# Altium PCB JacdacEc30RgbLedRing8 105.PcbDoc
Units mm, origin at the board's own origin, x right, y up, seen from the top; angles counter-clockwise.
Board outline 36.5 x 35 mm, 2 copper layers (Top Layer, Bottom Layer), stack 1.525 mm thick; 15 components, 3 nets, 58 pads, 1 vias.
Unrouted connection lines stored in the file: 9.
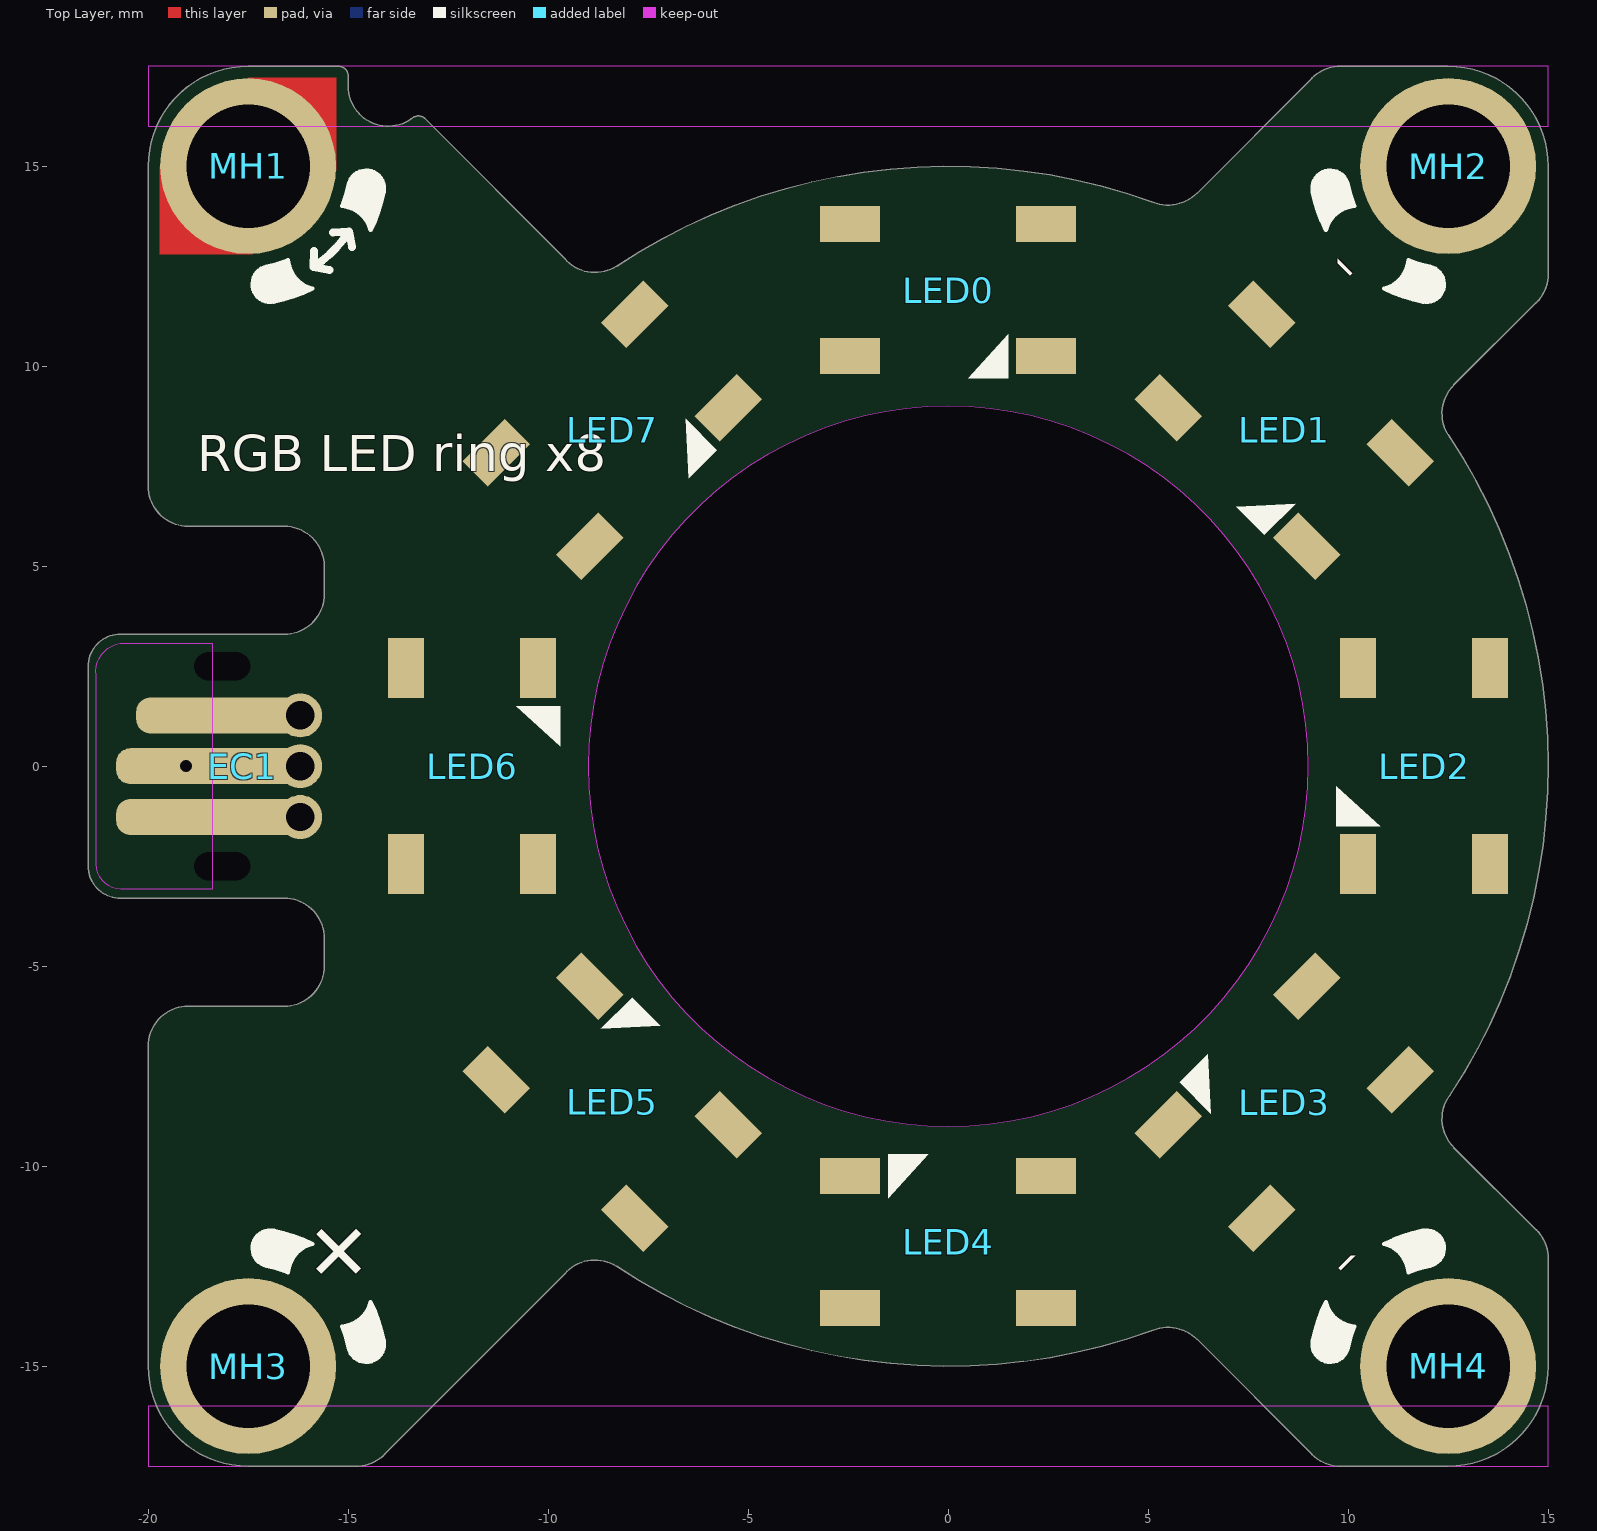
[diagram p0: Top Layer view]
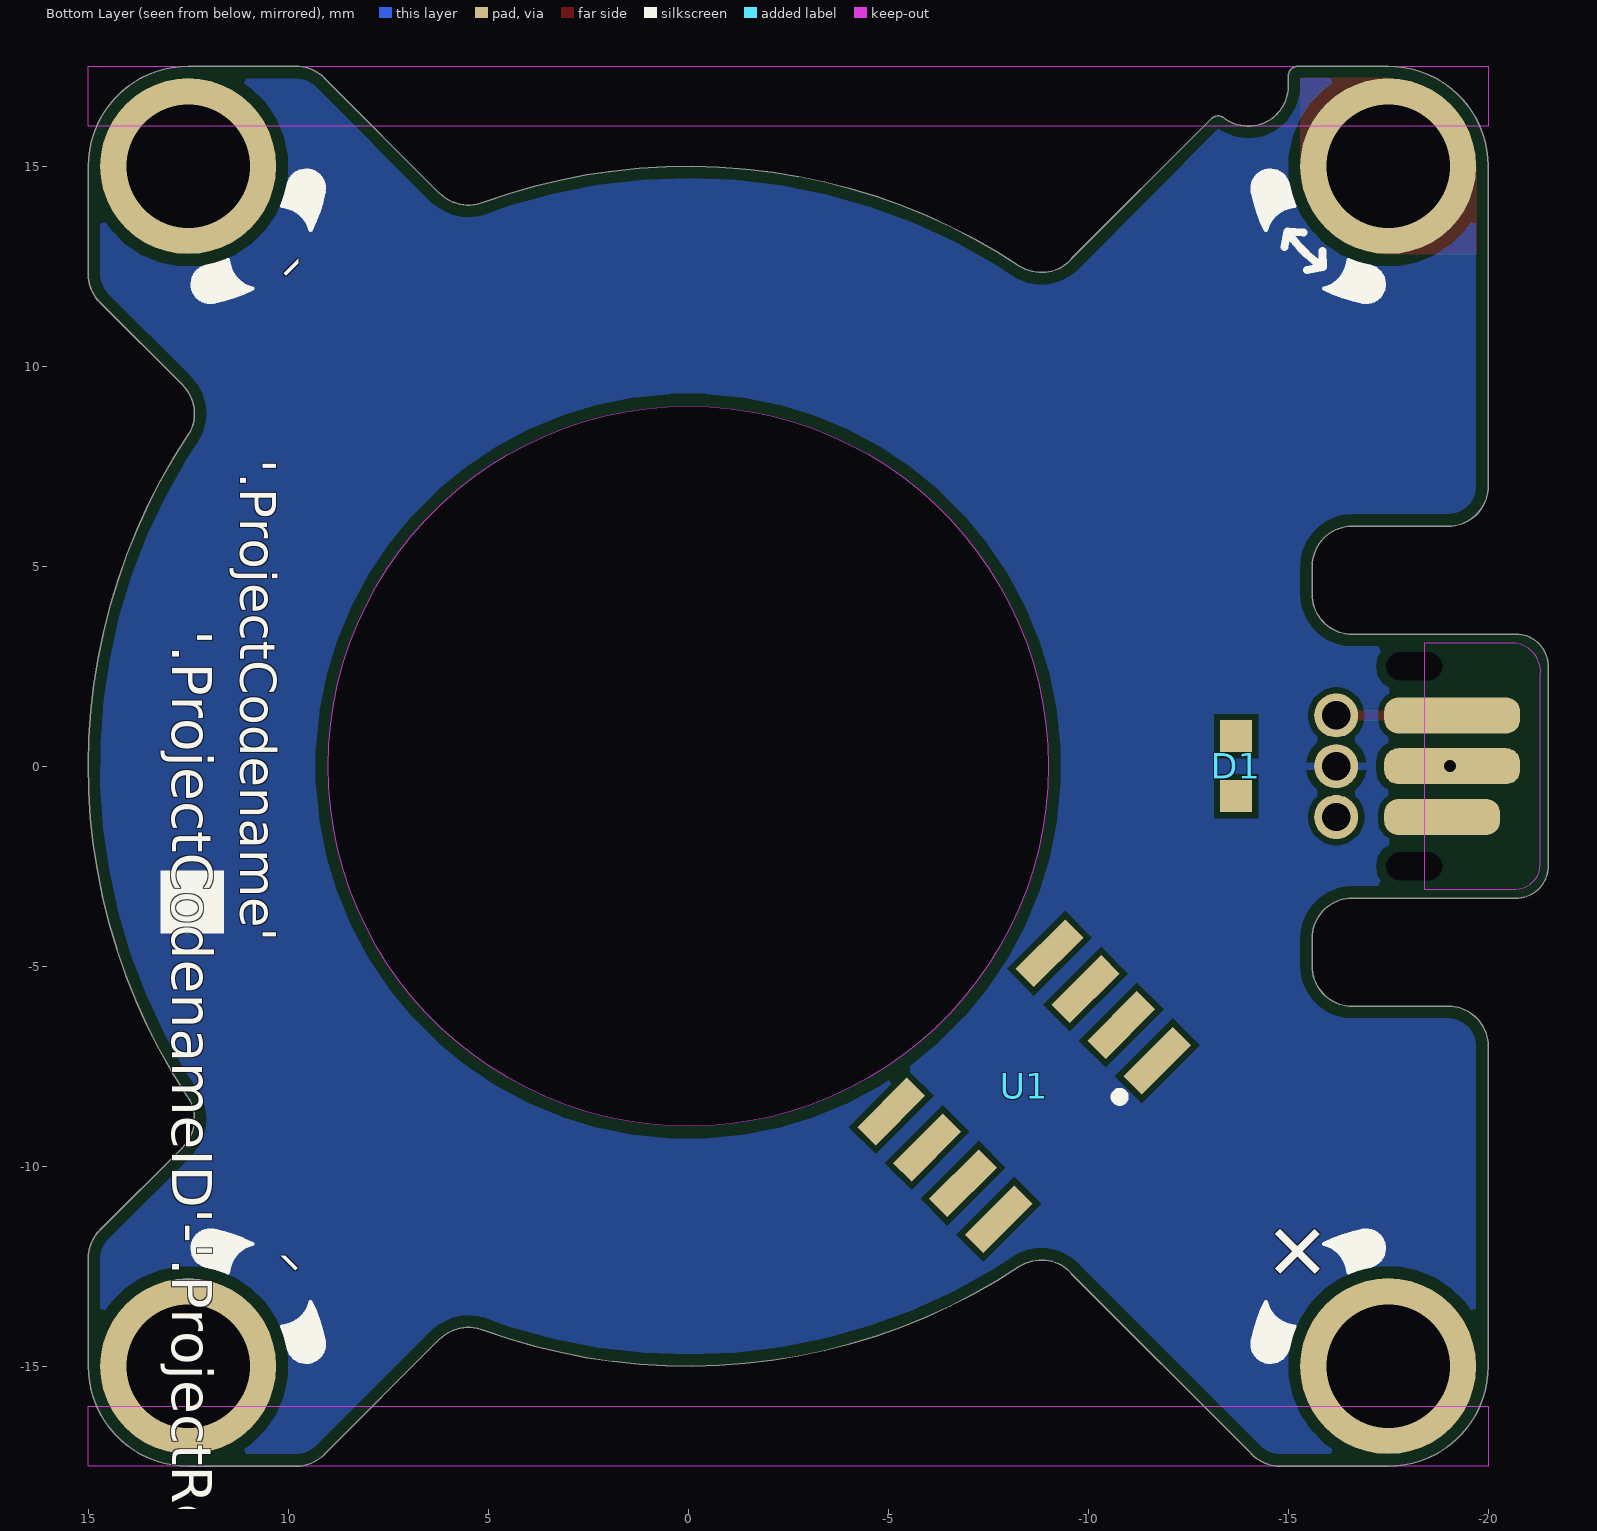
[diagram p1: Bottom Layer view, seen from below]
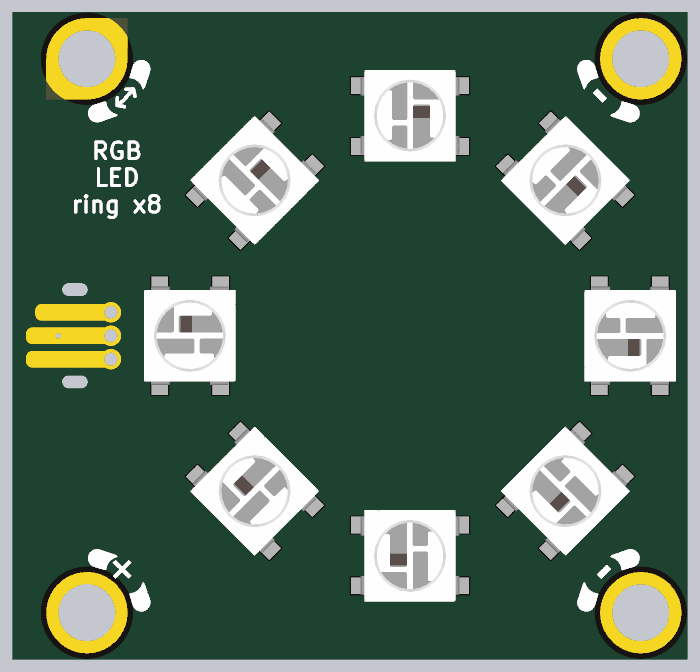
[diagram p2: 3D render of the assembled board from above, using the file's embedded part models]

## Layer stack, top to bottom
Top Solder: solder mask 0.0102, Solder Resist, Dk 3.5
Top Layer: signal copper 0.0356
Dielectric 1: core 1.454, FR-4, Dk 4.2
Bottom Layer: signal copper 0.0356
Bottom Solder: solder mask 0.0102, Solder Resist, Dk 3.5

## Board outline
-20,-7 cw(c-19,-7) -19,-6 -16.6,-6 ccw(c-16.6,-5) -15.6,-5 -15.6,-4.3 ccw(c-16.6,-4.3) -16.6,-3.3 -20.7,-3.3 cw(c-20.7,-2.5) -21.5,-2.5 -21.5,2.5 cw(c-20.7,2.5) -20.7,3.3 -16.6,3.3 -16.598,3.3 ccw(c-16.598,4.3) -15.598,4.3 -15.6,4.3 -15.6,5 ccw(c-16.6,5) -16.6,6 -19,6 cw(c-19,7) -20,7 -20,15 cw(c-17.5,15) -17.5,17.5 -15.25,17.5 cw(c-15.25,17.25) -15,17.25 -15,17 ccw(c-14,17) -13.357,16.234 -13.352,16.233 cw(c-13.247,16.007) -13.055,16.167 -9.59,12.698 -9.59,12.692 ccw(c-8.831,13.344) -8.288,12.505 -8.286,12.503 cw(c-0.001,-0.001) 5.119,14.099 5.121,14.105 ccw(c5.503,15.029) 6.218,14.329 6.22,14.318 9.1,17.208 9.093,17.206 cw(c9.8,16.498) 9.8,17.498 12.5,17.498 cw(c12.5,14.998) 15,14.998 15,12.298 cw(c14,12.298) 14.707,11.591 14.71,11.598 12.64,9.538 12.644,9.532 ccw(c13.344,8.817) 12.542,8.218 12.501,8.29 cw(c0,0) 12.546,-8.222 12.542,-8.22 ccw(c13.344,-8.818) 12.644,-9.533 12.64,-9.54 14.71,-11.6 14.707,-11.593 cw(c14,-12.3) 15,-12.3 15,-15 cw(c12.5,-15) 12.5,-17.5 9.8,-17.5 cw(c9.8,-16.5) 9.093,-17.207 9.1,-17.21 6.22,-14.32 6.218,-14.331 ccw(c5.503,-15.03) 5.121,-14.106 5.119,-14.1 cw(c-0.001,-0.001) -8.286,-12.505 -8.288,-12.506 ccw(c-8.831,-13.346) -9.59,-12.693 -9.59,-12.7 -14.1,-17.21 -14.093,-17.207 cw(c-14.8,-16.5) -14.8,-17.5 -17.5,-17.5 cw(c-17.5,-15) -20,-15
cut-out: -9,0 ccw(c0,0) 0,-9 ccw(c0,0) 9,0 ccw(c0,0) 0,9 ccw(c0,0)

## Design rules (kind name [scope] priority, off if disabled: settings)
AssemblyTestPointUsage [All] p1: valid=2
BoardOutlineClearance [not (HasFootprint('MOUSEBITE_CONNECTOR_3X2') or HasFootprint('MOUSEBITE_NOCONNECTOR_3'))] p1: gap=0.3 ignorepadtopadclearanceinfootprint=FALSE except(0: Arc-SplitContinuation Track-SplitContinuation SMDPad-SplitContinuation THPad-SplitContinuation Via-SplitContinuation Fill-SplitContinuation Poly-SplitContinuation Text-OutlineEdge Text-CavityEdge Text-CutoutEdge Text-SplitBarrior Text-SplitContinuation; 0.15: Region-OutlineEdge Region-CavityEdge Region-CutoutEdge Region-SplitBarrior Region-SplitContinuation)
Clearance [not (IsPad and HasFootprint('MOUSEBITE_CONNECTOR_3X2'))] p1: gap=0.15 ignorepadtopadclearanceinfootprint=FALSE except(0.254: Arc-Hole Track-Hole SMDPad-Hole THPad-Hole Via-Hole Fill-Hole Poly-Hole Region-Hole Text-Hole)
ComponentClearance [All] p1: gap=0.01 collisioncheckmode=3 verticalgap=0.2 showdistances=FALSE
DiffPairsRouting [All] p1: maxlimit=2 minlimit=0.15 mostfreqgap=0.15 toplayer_minwidth=0.15 toplayer_maxwidth=2 toplayer_prefwidth=0.15 bottomlayer_minwidth=0.15 bottomlayer_maxwidth=2 bottomlayer_prefwidth=0.15 substack1={CB9D278B-8BF5-444A-AAF4-837A2A9DF42D} toplayer_{cb9d278b-8bf5-444a-aaf4-837a2a9df42d}_minwidth=0.381 toplayer_{cb9d278b-8bf5-444a-aaf4-837a2a9df42d}_maxwidth=0.381 toplayer_{cb9d278b-8bf5-444a-aaf4-837a2a9df42d}_prefwidth=0.381 bottomlayer_{cb9d278b-8bf5-444a-aaf4-837a2a9df42d}_minwidth=0.381 bottomlayer_{cb9d278b-8bf5-444a-aaf4-837a2a9df42d}_maxwidth=0.381 bottomlayer_{cb9d278b-8bf5-444a-aaf4-837a2a9df42d}_prefwidth=0.381 substack2={826B8647-A721-4255-895A-19F9591B9CD1} toplayer_{826b8647-a721-4255-895a-19f9591b9cd1}_minwidth=0.381 toplayer_{826b8647-a721-4255-895a-19f9591b9cd1}_maxwidth=0.381 toplayer_{826b8647-a721-4255-895a-19f9591b9cd1}_prefwidth=0.381 bottomlayer_{826b8647-a721-4255-895a-19f9591b9cd1}_minwidth=0.381 bottomlayer_{826b8647-a721-4255-895a-19f9591b9cd1}_maxwidth=0.381 bottomlayer_{826b8647-a721-4255-895a-19f9591b9cd1}_prefwidth=0.381 substack3={E64FCAF4-1BC8-437D-B1E0-0E5F2DC0F59E} toplayer_{e64fcaf4-1bc8-437d-b1e0-0e5f2dc0f59e}_minwidth=0.381 toplayer_{e64fcaf4-1bc8-437d-b1e0-0e5f2dc0f59e}_maxwidth=0.381 toplayer_{e64fcaf4-1bc8-437d-b1e0-0e5f2dc0f59e}_prefwidth=0.381 bottomlayer_{e64fcaf4-1bc8-437d-b1e0-0e5f2dc0f59e}_minwidth=0.381 bottomlayer_{e64fcaf4-1bc8-437d-b1e0-0e5f2dc0f59e}_maxwidth=0.381 bottomlayer_{e64fcaf4-1bc8-437d-b1e0-0e5f2dc0f59e}_prefwidth=0.381 substack4={E61CE66C-507C-4E1E-8E83-C905434AFC1C} toplayer_{e61ce66c-507c-4e1e-8e83-c905434afc1c}_minwidth=0.381 toplayer_{e61ce66c-507c-4e1e-8e83-c905434afc1c}_maxwidth=0.381 toplayer_{e61ce66c-507c-4e1e-8e83-c905434afc1c}_prefwidth=0.381 bottomlayer_{e61ce66c-507c-4e1e-8e83-c905434afc1c}_minwidth=0.381 bottomlayer_{e61ce66c-507c-4e1e-8e83-c905434afc1c}_maxwidth=0.381 bottomlayer_{e61ce66c-507c-4e1e-8e83-c905434afc1c}_prefwidth=0.381 maxuncoupledlength=25
FabricationTestPointUsage [All] p1: valid=2 allowmultiple=FALSE
HoleSize [All] p1: absolutevalues=TRUE maxlimit=5 minlimit=0.3 maxpercent=80.000 minpercent=20.000
HoleToHoleClearance [IsPad and not (HasFootprint('MOUSEBITE_CONNECTOR_3X2') or HasFootprint('MOUSEBITE_NOCONNECTOR_3')) vs IsPad and not  (HasFootprint('MOUSEBITE_CONNECTOR_3X2') or HasFootprint('MOUSEBITE_NOCONNECTOR_3'))] p1: gap=0.5 allowstackedmicrovias=TRUE
MinimumAnnularRing [All] p1: minimumring=0.15
MinimumSolderMaskSliver [All] p1: minsoldermaskwidth=0.005
PlaneClearance [All] p1: clearance=0.3
PlaneConnect [All] p1: planeconnectstyle=Relief reliefexpansion=0.5 reliefentries=4 reliefconductorwidth=0.2 reliefairgap=0.3
PolygonConnect "PolygonConnect GND" [isVIA] p1: connectstyle=Relief reliefconductorwidth=0.2 reliefentries=4 polygonreliefangle="90 Angle" airgapwidth=0.2
PolygonConnect [All] p2: connectstyle=Relief reliefconductorwidth=0.2 reliefentries=4 polygonreliefangle="90 Angle" airgapwidth=0.2
RoutingVias [All] p1: holewidth=0.3 width=0.6 viastyle="Through Hole" minholewidth=0.3 minwidth=0.6 maxholewidth=0.3 maxwidth=0.8
SilkToSilkClearance [All] p1: silktosilkclearance=0.001
SilkToSolderMaskClearance [IsPad] p1: minsilkscreentomaskgap=0.05 clearancetoexposedcopper=TRUE
SolderMaskExpansion [All] p1: expansion=0.075 istentingtop=FALSE
UnRoutedNet [All] p1: checkbadconnections=TRUE
Width [All] p1: maxlimit=2 minlimit=0.15 preferedwidth=0.15 substack1={CB9D278B-8BF5-444A-AAF4-837A2A9DF42D} substack2={826B8647-A721-4255-895A-19F9591B9CD1} substack3={E64FCAF4-1BC8-437D-B1E0-0E5F2DC0F59E} substack4={E61CE66C-507C-4E1E-8E83-C905434AFC1C} minimp=50.000000 maximp=50.000000 favimp=50.000000
18 further rules are at their usual default settings.

## Classes and differential pairs
component class "JacdacEc30RgbLedRing8 105": D1 EC1 LED0 LED1 LED3 LED4 LED5 MH1 MH2 MH3 MH4 U1

## Components (designator, comment, footprint, x,y, rotation, side; value= is the part's Value field where it differs from the comment)
D1 "Everlight Elec'''" "0603 Orange" -13.7,0 r270 bottom
EC1 "Jacdac edge connector" JACDAC_EDGE_CONNECTOR_NO_TRACES_V2DIMS -15.65,0 r90 top
LED0 "WS2812E" WS2812E-5050 0,11.9 r0 top
LED1 "WS2812E" WS2812E-5050 8.4,8.4 r315 top
LED2 "WS2812E" WS2812E-5050 11.9,0 r270 top
LED3 "WS2812E" WS2812E-5050 8.4,-8.4 r225 top
LED4 "WS2812E" WS2812E-5050 0,-11.9 r180 top
LED5 "WS2812E" WS2812E-5050 -8.4,-8.4 r135 top
LED6 "WS2812E" WS2812E-5050 -11.9,0 r90 top
LED7 "WS2812E" WS2812E-5050 -8.4,8.4 r45 top
MH1 "MH_6.5MMK_4.5MMC_3.0MMD_PTH" MH_6.5MMK_4.5MMC_3.0MMD_PTH -17.5,15 r90 top
MH2 "MH_6.5MMK_4.5MMC_3.0MMD_PTH" MH_6.5MMK_4.5MMC_3.0MMD_PTH 12.5,15 r90 top
MH3 "MH_6.5MMK_4.5MMC_3.0MMD_PTH" MH_6.5MMK_4.5MMC_3.0MMD_PTH -17.5,-15 r90 top
MH4 "MH_6.5MMK_4.5MMC_3.0MMD_PTH" MH_6.5MMK_4.5MMC_3.0MMD_PTH 12.5,-15 r90 top
U1 "STM32G031J6M6" 8-SOIC -8.4,-8 r315 bottom

## Footprints (in the part's own frame and the unit in brackets; to place one, negate y for a bottom-side part, rotate by r counter-clockwise, add the part's x,y. Pads: shape width x height; smd on the part's side, far side on the other; paste and mask are expansions set on the pad)
8-SOIC [mm] "0.154\", 3.90mm Width"
  rect 1.75x0.65 smd paste-0.05: 1(-2.8,1.905) 2(-2.8,0.635) 3(-2.8,-0.635) 4(-2.8,-1.905) 5(2.8,-1.905) 6(2.8,-0.635) 7(2.8,0.635) 8(2.8,1.905)
  silkscreen extent -1.6,1.78 -1.4,1.97, body extent -3,-2.45 3,2.45, height 1.75
"0603 Orange" [mm]
  rect 0.8x0.8 smd paste-0.05: 1(-0.75,0) 2(0.75,0)
  body extent -0.79,-0.4 0.81,0.4, height 0.4
JACDAC_EDGE_CONNECTOR_NO_TRACES_V2DIMS [mm] "Jacdac 3 pin connector with no traces and new slot definition"
  rrect78% 0.9x2.9 smd far side paste-1 mask+0: 1(-1.27,3.2)
  rrect78% 0.9x4.3 smd paste-1 mask+0: 1(1.27,2.5)
  round 1.1 hole 0.71 paste-0.254 mask+0: 1(1.27,0.55) 2(0,0.55) 3(-1.27,0.55)
  rrect78% 0.9x3.4 smd far side paste-1 mask+0: 2(0,3.45) 2(0,3.45) 3(1.27,3.45)
  rrect78% 0.9x4.8 smd paste-1 mask+0: 2(0,2.75) 3(-1.27,2.75)
  round 0 hole 0.7 slot 1.4 at 90 deg unplated: ""(-2.5,2.5) ""(2.5,2.5)
  Top Layer keep-out region: -3.075,2.75 -3.07,5.033 -2.987,5.341 -2.761,5.567 -2.453,5.65 -2.453,5.65 2.27,5.65 2.545,5.635 2.794,5.516 2.978,5.31 3.07,5.05 3.07,5.05 3.07,2.75
  Bottom Layer lines w0.2: -1.27,0.85 -1.126,0.85
  Bottom Layer keep-out region: -3.07,2.75 -3.07,5.033 -3.023,5.269 -2.889,5.469 -2.689,5.603 -2.453,5.65 -2.453,5.65 2.27,5.65 2.546,5.635 2.794,5.516 2.978,5.31 3.07,5.05 3.07,5.05 3.07,2.75
MH_6.5MMK_4.5MMC_3.0MMD_PTH [mm] "Jacdac mounting hole 6.5mm clearance, 4.5 annualar ring and 3.0mm PTH"
  round 4.4 hole 3.08 mask+0.3: 1(0,0)
WS2812E-5050 [mm] "SMD-5050 Light Emitting Diodes"
  rect 1.5x0.9 smd: 1(-2.45,1.65) 2(-2.45,-1.65) 3(2.45,-1.65) 4(2.45,1.65)
  silkscreen extent 0.5,-2.2 1.5,-1.1, body extent -2.68,-2.45 2.67,2.5, height 1.5

## Part data
D1: library part 19-217/S2C-AQ1R1B/3T, "LED ORANGE DIFFUSED 0603 SMD", Case Code (Imperial)=0603, Color=Orange, Manufacturer="Everlight Elec", Supplier 1 Part Number=C146215, Case/Package=0603, Colour=Orange, ComponentLink1Description="Online datasheet", ComponentLink1URL=https://datasheet.lcsc.com/lcsc/1912171731_Everlight-Elec-19-217-S2C-AQ1R1B-3T_C146215.pdf, Manufacturer Part Number=19-217/S2C-AQ1R1B/3T, Mount="Surface Mount", Supplier 1=LCSC
EC1: "3 pin Jacdac edge connector 1.27mm pitch", Manufacturer Part Number=JACDAC_EDGE_CONNECTOR, Checked By=?, ComponentLink1Description="Yuliang JACDAC cable connector drawing online", ComponentLink1URL=https://github.com/microsoft/jacdac-mdk/blob/main/connector/JACDAC-Connector-by-Yuliang-2020-11-28.pdf, ComponentLink2Description="JACDAC PCB edge connector spec onlin", ComponentLink2URL=https://github.com/microsoft/jacdac-mdk/blob/main/connector/JACDAC_PCB_Edge_Connector_Drawing_JD-PEC-01_rev_01.pdf, Created By="D. Gakure", PCB Type="1.6mm FR4"
LED0 LED1 LED2 LED3 LED4 LED5 LED6 LED7: library part WS2812E-5050, "WS2812E 5050 RGB LED WITH INTEGRATED DRIVER", Color=Blue,Green,Red, Manufacturer=Worldsemi, Supplier 1 Part Number 3=C139127, Category=LEDs, ComponentLink1Description="Online datasheet", ComponentLink1URL=https://datasheet.lcsc.com/lcsc/1811151230_Worldsemi-WS2812E_C139127.pdf, Length=5mm, Manufacturer Part Number=WS2812E, Mount="Surface Mount", RoHS=Yes, Supplier 1=LCSC, Width=5mm
MH1 MH2 MH3 MH4: "Mounting Hole 6.5mm keepout, 4.5mm annualar ring and 3.0mm Drill PTH"
U1: "MCU 32-bit ARM Cortex M0+ RISC 32KB Flash 2.5V/3.3V 8-Pin SO N Tube", Manufacturer=STMicroelectronics, Supplier Part Number 1=497-19552-ND, Category=Microcontrollers, Checked By=?, ComponentLink1Description="Online datasheet", ComponentLink1URL=https://www.st.com/resource/en/datasheet/stm32g031c6.pdf, Created By="D. Gakure", Manufacturer Part Number=STM32G031J6M6, Pricing 1="1=1.80000, 10=1.61600, 25=1.52480, 100=1.29920, 250=1.21992, 500=1.06744, 1000=0.88952 (USD)", Pricing 2="1=1.91000, 25=1.70000, 75=1.63000, 150=1.59000, 400=1.53000 (USD)", Pricing 3="1=1.50000, 10=1.28000, 50=1.28000, 100=1.09000, 1000=0.73700, 10000=0.71100 (USD)", RoHS=Yes, Supplier 1=Digi-Key, Supplier 2="Future Electronics", Supplier 3=Mouser, Supplier Part Number 2=2116576, Supplier Part Number 3=511-STM32G031J6M6

## Via types
v1: diameter 0.6, hole 0.3, Top Layer to Bottom Layer, tented both sides, 1 vias

## Nets (pads, with @x,y where several pads share a name; then routed paths per layer and width w, separated by ;. In a path a pad name is that pad's centre, name@x,y a point inside that pad or via, vN(x,y) a via of type N, cw(c..) or ccw(c..) an arc to the next point about the centre after c; other vN are vias at no path point)
GND: EC1.2 MH2.1 MH4.1
  other v1: -19.05,0
JD_DATA: EC1.1 MH1.1 | length 2
  Top Layer w0.25: EC1.1@-18.15,1.27 EC1.1@-16.2,1.27
JD_PWR: EC1.3 MH3.1
pads on no net: D1.1 D1.2 EC1. LED0.1 LED0.2 LED0.3 LED0.4 LED1.1 LED1.2 LED1.3 LED1.4 LED2.1 LED2.2 LED2.3 LED2.4 LED3.1 LED3.2 LED3.3 LED3.4 LED4.1 LED4.2 LED4.3 LED4.4 LED5.1 LED5.2 LED5.3 LED5.4 LED6.1 LED6.2 LED6.3 LED6.4 LED7.1 LED7.2 LED7.3 LED7.4 U1.1 U1.2 U1.3 U1.4 U1.5 U1.6 U1.7 U1.8

## Polygon pours and split planes (outlines as drawn)
no net on Bottom Assy "NONET_L-01_P-001" (hatched 45Degree grid 0.15 track 0.01): 15,13.342 cw(c12.5,15) 10.842,17.5 12.5,17.5 cw(c12.5,15) 15,15
no net on Bottom Assy "NONET_L-01_P-001" (hatched 45Degree grid 0.15 track 0.01): 10.842,-17.5 cw(c12.5,-15) 15,-13.342 15,-15 cw(c12.5,-15) 12.5,-17.5
no net on Bottom Assy "NONET_L-01_P-001" (hatched 45Degree grid 0.15 track 0.01): -21.1,-2.468 ccw(c-20.7,-2.468) -20.7,-2.868 -16.8,-2.868 -16.8,2.874 -20.698,2.874 -20.7,2.874 ccw(c-20.7,2.474) -21.1,2.474 -21.1,2.477
no net on Bottom Assy "NONET_L-01_P-001" (hatched 45Degree grid 0.15 track 0.01): -20,-13.342 cw(c-17.5,-15) -15.842,-17.5 -17.5,-17.5 cw(c-17.5,-15) -20,-15
no net on Bottom Assy "NONET_L-01_P-001" (hatched 45Degree grid 0.15 track 0.01): -20,13.35 ccw(c-17.5,15.008) -15.842,17.508 -17.5,17.508 ccw(c-17.5,15.008) -20,15.008
no net on Bottom Assy "NONET_L-01_P-001" (solid): 12.5,12.8 ccw(c12.5,15) 14.7,15 ccw(c12.5,15) 12.5,17.2 ccw(c12.5,15) 10.3,15 ccw(c12.5,15)
no net on Bottom Assy "NONET_L-01_P-001" (solid): 12.5,-17.2 ccw(c12.5,-15) 14.7,-15 ccw(c12.5,-15) 12.5,-12.8 ccw(c12.5,-15) 10.3,-15 ccw(c12.5,-15)
no net on Bottom Assy "NONET_L-01_P-001" (solid): -17.5,12.8 ccw(c-17.5,15) -15.3,15 ccw(c-17.5,15) -17.5,17.2 ccw(c-17.5,15) -19.7,15 ccw(c-17.5,15)
no net on Bottom Assy "NONET_L-01_P-001" (solid): -19.949,-0.82 ccw(c-19.949,-1.171) -20.3,-1.171 -20.3,-1.369 ccw(c-19.949,-1.369) -19.949,-1.72 -16.516,-1.72 ccw(c-16.2,-1.27) -16.516,-0.82
no net on Bottom Assy "NONET_L-01_P-001" (solid): -20.449,-0.82 ccw(c-20.449,-1.171) -20.8,-1.171 -20.8,-1.369 ccw(c-20.449,-1.369) -20.449,-1.72 -16.516,-1.72 ccw(c-16.2,-1.27) -16.516,-0.82
no net on Bottom Assy "NONET_L-01_P-001" (solid): -20.449,-0.82 ccw(c-20.449,-1.171) -20.8,-1.171 -20.8,-1.369 ccw(c-20.449,-1.369) -20.449,-1.72 -16.516,-1.72 ccw(c-16.2,-1.27) -16.516,-0.82
no net on Bottom Assy "NONET_L-01_P-001" (solid): -17.5,-17.2 ccw(c-17.5,-15) -15.3,-15 ccw(c-17.5,-15) -17.5,-12.8 ccw(c-17.5,-15) -19.7,-15 ccw(c-17.5,-15)
no net on Bottom Assy "NONET_L-01_P-001" (solid): -17.4,12.8 -15.3,14.9 -15.3,17.215 -17.485,17.215 -19.715,14.985 -19.715,12.8
no net on Bottom Assy "NONET_L-01_P-001" (hatched 45Degree grid 0.3 track 0.01): -20,-7.3 -20,-7 cw(c-19,-7) -19,-6 -16.6,-6 ccw(c-16.6,-5) -15.6,-5 -15.6,-4.3 ccw(c-16.6,-4.3) -16.6,-3.3 -20.7,-3.3 cw(c-20.7,-2.5) -21.5,-2.5 -21.5,2.5 cw(c-20.7,2.5) -20.7,3.3 -16.6,3.3 ccw(c-16.6,4.3) -15.6,4.3 -15.6,5 ccw(c-16.6,5) -16.6,6 -19,6 cw(c-19,7) -20,7 -20,7.3 -18.9,7.3 -17.5,7 -14.5,7 -14.5,-7 -17.5,-7 -18.9,-7.3
no net on Bottom Assy "NONET_L-01_P-001" (hatched 45Degree grid 0.3 track 0.01): -19.999,12.55 ccw(c-17.5,15) -14.15,16.015 -14.156,16.012 cw(c-14,17) -15,17 -15,17.25 ccw(c-15.25,17.25) -15.25,17.5 -17.5,17.5 ccw(c-17.5,15) -20,15
no net on Bottom Assy "NONET_L-01_P-001" (hatched 45Degree grid 0.3 track 0.01): -20,-15 ccw(c-17.5,-15) -17.5,-17.5 -15.229,-17.5 12.5,-17.5 ccw(c12.5,-15) 15,-15 15,-12.551 ccw(c12.5,-15) 9.146,-16 -14.146,-16 ccw(c-17.5,-15) -20.001,-12.551 -20,-12.551
no net on Bottom Assy "NONET_L-01_P-001" (hatched 45Degree grid 0.3 track 0.01): -14,16 ccw(c-14,17) -13,17 -13,17.25 cw(c-12.75,17.25) -12.75,17.5 12.5,17.5 cw(c12.5,15) 15,15 15,12.551 cw(c12.5,15) 9.146,16
GND on Bottom Layer "NONET_L-01_P-001" (solid, pour order 1): -20,-7 cw(c-19,-7) -19,-6 -16.6,-6 ccw(c-16.6,-5) -15.6,-5 -15.6,-4.3 ccw(c-16.6,-4.3) -16.6,-3.3 -20.7,-3.3 cw(c-20.7,-2.5) -21.5,-2.5 -21.5,2.5 cw(c-20.7,2.5) -20.7,3.3 -16.6,3.3 -16.598,3.3 ccw(c-16.598,4.3) -15.598,4.3 -15.6,4.3 -15.6,5 ccw(c-16.6,5) -16.6,6 -19,6 cw(c-19,7) -20,7 -20,15 cw(c-17.5,15) -17.5,17.5 -15.25,17.5 cw(c-15.25,17.25) -15,17.25 -15,17 ccw(c-14,17) -13.357,16.234 -13.352,16.233 cw(c-13.247,16.007) -13.055,16.167 -9.59,12.698 -9.59,12.692 ccw(c-8.831,13.344) -8.288,12.505 -8.286,12.503 cw(c-0.001,-0.001) 5.119,14.099 5.121,14.105 ccw(c5.503,15.029) 6.218,14.329 6.22,14.318 9.1,17.208 9.093,17.206 cw(c9.8,16.498) 9.8,17.498 12.5,17.498 cw(c12.5,14.998) 15,14.998 15,12.298 cw(c14,12.298) 14.707,11.591 14.71,11.598 12.64,9.538 12.644,9.532 ccw(c13.344,8.817) 12.542,8.218 12.501,8.29 cw(c0,0) 12.546,-8.222 12.542,-8.22 ccw(c13.344,-8.818) 12.644,-9.533 12.64,-9.54 14.71,-11.6 14.707,-11.593 cw(c14,-12.3) 15,-12.3 15,-15 cw(c12.5,-15) 12.5,-17.5 9.8,-17.5 cw(c9.8,-16.5) 9.093,-17.207 9.1,-17.21 6.22,-14.32 6.218,-14.331 ccw(c5.503,-15.03) 5.121,-14.106 5.119,-14.1 cw(c-0.001,-0.001) -8.286,-12.505 -8.288,-12.506 ccw(c-8.831,-13.346) -9.59,-12.693 -9.59,-12.7 -14.1,-17.21 -14.093,-17.207 cw(c-14.8,-16.5) -14.8,-17.5 -17.5,-17.5 cw(c-17.5,-15) -20,-15
no net on Bottom Assy "NONET_L-01_P-001" (hatched Horizontal grid 0.07 track 0.15): -20,-7 cw(c-19,-7) -19,-6 -16.6,-6 ccw(c-16.6,-5) -15.6,-5 -15.6,-4.3 ccw(c-16.6,-4.3) -16.6,-3.3 -20.7,-3.3 cw(c-20.7,-2.5) -21.5,-2.5 -21.5,2.5 cw(c-20.7,2.5) -20.7,3.3 -16.6,3.3 -16.598,3.3 ccw(c-16.598,4.3) -15.598,4.3 -15.6,4.3 -15.6,5 ccw(c-16.6,5) -16.6,6 -19,6 cw(c-19,7) -20,7 -20,15 cw(c-17.5,15) -17.5,17.5 -15.25,17.5 cw(c-15.25,17.25) -15,17.25 -15,17 ccw(c-14,17) -13.357,16.234 -13.352,16.233 cw(c-13.247,16.007) -13.055,16.167 -9.59,12.698 -9.59,12.692 ccw(c-8.831,13.344) -8.288,12.505 -8.286,12.503 cw(c-0.001,-0.001) 5.119,14.099 5.121,14.105 ccw(c5.503,15.029) 6.218,14.329 6.22,14.318 9.1,17.208 9.093,17.206 cw(c9.8,16.498) 9.8,17.498 12.5,17.498 cw(c12.5,14.998) 15,14.998 15,12.298 cw(c14,12.298) 14.707,11.591 14.71,11.598 12.64,9.538 12.644,9.532 ccw(c13.344,8.817) 12.542,8.218 12.501,8.29 cw(c0,0) 12.546,-8.222 12.542,-8.22 ccw(c13.344,-8.818) 12.644,-9.533 12.64,-9.54 14.71,-11.6 14.707,-11.593 cw(c14,-12.3) 15,-12.3 15,-15 cw(c12.5,-15) 12.5,-17.5 9.8,-17.5 cw(c9.8,-16.5) 9.093,-17.207 9.1,-17.21 6.22,-14.32 6.218,-14.331 ccw(c5.503,-15.03) 5.121,-14.106 5.119,-14.1 cw(c-0.001,-0.001) -8.286,-12.505 -8.288,-12.506 ccw(c-8.831,-13.346) -9.59,-12.693 -9.59,-12.7 -14.1,-17.21 -14.093,-17.207 cw(c-14.8,-16.5) -14.8,-17.5 -17.5,-17.5 cw(c-17.5,-15) -20,-15

## Keep-outs
Keep-Out Layer:
  region: 15,-17.5 15,-16 -20,-16 -20,-17.5
  region: 15,16 15,17.5 -20,17.5 -20,16

## Other copper
Top Layer:
  region net JD_DATA: -19.715,12.8 -17.4,12.8 -15.3,14.9 -15.3,17.215 -17.485,17.215 -19.715,14.985
  text "Top Layer" at 17.201,16.75 h1.7
Bottom Layer:
  pour cut-out: 12.5,-17.5 ccw(c12.5,-15) 15,-15 ccw(c12.5,-15) 12.5,-12.5 ccw(c12.5,-15) 10,-15 ccw(c12.5,-15)
  pour cut-out: 12.5,12.5 ccw(c12.5,15) 15,15 ccw(c12.5,15) 12.5,17.5 ccw(c12.5,15) 10,15 ccw(c12.5,15)
  pour cut-out: -17.5,12.5 ccw(c-17.5,15) -15,15 ccw(c-17.5,15) -17.5,17.5 ccw(c-17.5,15) -20,15 ccw(c-17.5,15)
  pour cut-out: -17.5,-17.5 ccw(c-17.5,-15) -15,-15 ccw(c-17.5,-15) -17.5,-12.5 ccw(c-17.5,-15) -20,-15 ccw(c-17.5,-15)
  text "Bottom Layer" at 17.2,15.25 h1.7

## Silkscreen, mask and mechanical layers (free items; w line width, h text height)
Top Overlay:
  region: -15.899,11.944 cw(c-15.706,12.72) -16.503,12.653 -16.527,12.643 cw(c-17.5,15) -17.039,12.492 ccw(c-16.946,12.052) -16.852,11.612 -16.874,11.607 ccw(c-17.5,15)
  region: -14.444,13.399 ccw(c-15.22,13.205) -15.153,14.003 -15.143,14.027 ccw(c-17.5,15) -14.992,14.539 cw(c-14.552,14.445) -14.112,14.352 -14.107,14.374 cw(c-17.5,15)
  region: -14.444,-13.399 cw(c-15.22,-13.206) -15.153,-14.003 -15.143,-14.027 cw(c-17.5,-15) -14.992,-14.539 ccw(c-14.552,-14.446) -14.112,-14.352 -14.107,-14.374 ccw(c-17.5,-15)
  region: -15.899,-11.944 ccw(c-15.706,-12.72) -16.503,-12.653 -16.527,-12.643 ccw(c-17.5,-15) -17.039,-12.492 cw(c-16.946,-12.052) -16.852,-11.612 -16.874,-11.607 cw(c-17.5,-15)
  region: 9.444,-13.399 ccw(c10.22,-13.206) 10.153,-14.003 10.143,-14.027 ccw(c12.5,-15) 9.992,-14.539 cw(c9.552,-14.446) 9.112,-14.352 9.107,-14.374 cw(c12.5,-15)
  region: 10.899,-11.944 cw(c10.706,-12.72) 11.503,-12.653 11.527,-12.643 cw(c12.5,-15) 12.039,-12.492 ccw(c11.945,-12.052) 11.852,-11.612 ccw(c12.499,-15)
  region: 9.444,13.399 cw(c10.22,13.206) 10.153,14.003 10.143,14.027 cw(c12.5,15) 9.992,14.539 ccw(c9.552,14.445) 9.112,14.352 ccw(c12.5,14.999)
  region: 10.899,11.944 ccw(c10.705,12.72) 11.503,12.653 11.527,12.643 ccw(c12.5,15) 12.039,12.492 cw(c11.945,12.052) 11.852,11.612 11.874,11.607 cw(c12.5,15)
  lines w0.1: -17.039,12.492 ccw(c-17.5,15) -16.527,12.643 ; -17.039,12.492 ccw(c-16.946,12.052) -16.852,11.612 ; -16.874,-11.607 cw(c-17.5,-15) -15.899,-11.944 ccw(c-15.706,-12.72) -16.503,-12.653 ; -16.874,11.607 ccw(c-17.5,15) -15.899,11.944 cw(c-15.706,12.72) -16.503,12.653 ; -16.852,-11.612 ccw(c-16.946,-12.052) -17.039,-12.492 cw(c-17.5,-15) -16.527,-12.643 ; -15.153,-14.003 ccw(c-15.22,-13.206) -14.444,-13.399 cw(c-17.5,-15) -14.107,-14.374 ; -15.153,14.003 cw(c-15.22,13.206) -14.444,13.4 ccw(c-17.5,15) -14.107,14.374 ; -15.143,-14.027 cw(c-17.5,-15) -14.992,-14.539 ccw(c-14.552,-14.446) -14.112,-14.352 ; -15.143,14.027 ccw(c-17.5,15) -14.992,14.539 cw(c-14.552,14.446) -14.112,14.352 ; 9.107,-14.374 cw(c12.5,-15) 9.444,-13.399 ccw(c10.22,-13.206) 10.153,-14.003 ; 9.112,-14.352 ccw(c9.552,-14.446) 9.992,-14.539 cw(c12.5,-15) 10.143,-14.027 ; 10.143,14.027 cw(c12.5,15) 9.992,14.539 ccw(c9.552,14.446) 9.112,14.352 ccw(c12.5,15) 9.444,13.399 cw(c10.22,13.206) 10.153,14.003 ; 10.899,-11.944 cw(c12.5,-15) 11.852,-11.611 cw(c11.946,-12.052) 12.04,-12.492 ccw(c12.5,-15) 11.527,-12.643 ; 10.899,11.944 ccw(c12.5,15) 11.874,11.607 ; 10.9,-11.944 cw(c10.706,-12.72) 11.503,-12.653 ; 10.9,11.944 ccw(c10.706,12.72) 11.503,12.653 ; 11.527,12.643 ccw(c12.5,15) 12.039,12.492 ; 11.852,11.612 ccw(c11.946,12.052) 12.04,12.492
  lines w0.2: -15.852,12.884 -15.866,12.484 ; -15.473,12.408 -15.866,12.484 ; -15.383,13.345 -14.984,13.366 ; -14.901,12.975 -14.984,13.366 ; -15.866,12.484 ccw(c-17.5,15) -14.984,13.366
  text "-" at 11.143,13.146 h3.5 r135
  text "Top Overlay" at 17.201,11.1 h1.7
  text "RGB LED ring x8" at -18.775,7.375 h0.9
  text "-" at 10.646,-13.643 h3.5 r45
  text "+" at -15.45,-13.67 h2.8 r315
Bottom Overlay:
  region: 13.196,-4.188 13.196,-2.612 11.604,-2.612 11.604,-4.188
  region: -14.444,13.399 ccw(c-15.22,13.205) -15.153,14.003 -15.143,14.027 ccw(c-17.5,15) -14.992,14.539 cw(c-14.552,14.445) -14.112,14.352 -14.107,14.374 cw(c-17.5,15)
  region: -15.899,11.944 cw(c-15.706,12.72) -16.503,12.653 -16.527,12.643 cw(c-17.5,15) -17.039,12.492 ccw(c-16.946,12.052) -16.852,11.612 -16.874,11.607 ccw(c-17.5,15)
  region: -14.444,-13.399 cw(c-15.22,-13.206) -15.153,-14.003 -15.143,-14.027 cw(c-17.5,-15) -14.992,-14.539 ccw(c-14.552,-14.446) -14.112,-14.352 -14.107,-14.374 ccw(c-17.5,-15)
  region: -15.899,-11.944 ccw(c-15.706,-12.72) -16.503,-12.653 -16.527,-12.643 ccw(c-17.5,-15) -17.039,-12.492 cw(c-16.946,-12.052) -16.852,-11.612 -16.874,-11.607 cw(c-17.5,-15)
  region: 10.899,11.944 ccw(c10.705,12.72) 11.503,12.653 11.527,12.643 ccw(c12.5,15) 12.039,12.492 cw(c11.945,12.052) 11.852,11.612 11.874,11.607 cw(c12.5,15)
  region: 9.444,-13.399 ccw(c10.22,-13.206) 10.153,-14.003 10.143,-14.027 ccw(c12.5,-15) 9.992,-14.539 cw(c9.552,-14.446) 9.112,-14.352 9.107,-14.374 cw(c12.5,-15)
  region: 10.899,-11.944 cw(c10.706,-12.72) 11.503,-12.653 11.527,-12.643 cw(c12.5,-15) 12.039,-12.492 ccw(c11.945,-12.052) 11.852,-11.612 ccw(c12.499,-15)
  region: 9.444,13.399 cw(c10.22,13.206) 10.153,14.003 10.143,14.027 cw(c12.5,15) 9.992,14.539 ccw(c9.552,14.445) 9.112,14.352 ccw(c12.5,14.999)
  lines w0.1: -17.039,12.492 ccw(c-17.5,15) -16.527,12.643 ; -17.039,12.492 ccw(c-16.946,12.052) -16.852,11.612 ; -16.874,-11.607 cw(c-17.5,-15) -15.899,-11.944 ccw(c-15.706,-12.72) -16.503,-12.653 ; -16.874,11.607 ccw(c-17.5,15) -15.899,11.944 cw(c-15.706,12.72) -16.503,12.653 ; -16.852,-11.612 ccw(c-16.946,-12.052) -17.039,-12.492 cw(c-17.5,-15) -16.527,-12.643 ; -15.153,-14.003 ccw(c-15.22,-13.206) -14.444,-13.399 cw(c-17.5,-15) -14.107,-14.374 ; -15.153,14.003 cw(c-15.22,13.206) -14.444,13.4 ccw(c-17.5,15) -14.107,14.374 ; -15.143,-14.027 cw(c-17.5,-15) -14.992,-14.539 ccw(c-14.552,-14.446) -14.112,-14.352 ; -15.143,14.027 ccw(c-17.5,15) -14.992,14.539 cw(c-14.552,14.446) -14.112,14.352 ; 9.107,-14.374 cw(c12.5,-15) 9.444,-13.399 ccw(c10.22,-13.206) 10.153,-14.003 ; 9.112,-14.352 ccw(c9.552,-14.446) 9.992,-14.539 cw(c12.5,-15) 10.143,-14.027 ; 10.143,14.027 cw(c12.5,15) 9.992,14.539 ccw(c9.552,14.446) 9.112,14.352 ccw(c12.5,15) 9.444,13.399 cw(c10.22,13.206) 10.153,14.003 ; 10.899,-11.944 cw(c12.5,-15) 11.852,-11.611 cw(c11.946,-12.052) 12.04,-12.492 ccw(c12.5,-15) 11.527,-12.643 ; 10.899,11.944 ccw(c12.5,15) 11.874,11.607 ; 10.9,-11.944 cw(c10.706,-12.72) 11.503,-12.653 ; 10.9,11.944 ccw(c10.706,12.72) 11.503,12.653 ; 11.527,12.643 ccw(c12.5,15) 12.039,12.492 ; 11.852,11.612 ccw(c11.946,12.052) 12.04,12.492
  lines w0.2: -15.852,12.884 -15.866,12.484 ; -15.473,12.408 -15.866,12.484 ; -15.383,13.345 -14.984,13.366 ; -14.901,12.975 -14.984,13.366 ; -15.866,12.484 ccw(c-17.5,15) -14.984,13.366
  text "Bottom Overlay" at 25.8,16.725 h1.7
  text "-" at 11.143,13.146 h3.5 r135
  text "'.ProjectCodename'" at 11.2,7.671 h0.9 r90
  text "'.ProjectCodenameID'-'.ProjectRevision'" at 12.9,3.4 h1 r90
  text "-" at 10.646,-13.643 h3.5 r45
  text "+" at -15.45,-13.67 h2.8 r315
Top Paste:
  text "Top Paste" at 25.801,15.318 h1.7
Bottom Paste:
  text "Bottom Paste" at 25.8,13.84 h1.7
Top Solder:
  text "Top Solder (resist)" at 25.801,12.518 h1.7
Bottom Solder:
  text "Bottom Solder (resist)" at 25.8,11.027 h1.7
Drill Guide:
  text "Drill Guide" at 39.225,12.515 h1.7
Dimension:
  circle w0.1: c12.5,-15 r2.2
  circle w0.1: c-17.5,-15 r3.5
  text "Dimension" at 39.225,13.815 h1.7
Fabrication notes:
  lines w0.1: -41.208,-7.825 -41.558,-7.475 ; -41.208,-7.125 -41.558,-7.475 ; -41.208,7.125 -41.558,7.475 ; -41.208,7.825 -41.558,7.475 ; -22.2,-0.2 -19.9,-2.5 -19.4,-2.5 -18.15,-2.5 ; -22.2,0.2 -19.9,2.5 -19.4,2.5 -18.15,2.5 ; -15.49,-7.475 -41.558,-7.475 ; -15.488,-7.475 -15.49,7.475 -41.558,7.475
  text "Fabrication Notes" at 39.225,16.715 h1.7
  text "non-plated slots x2" at -33.099,-0.407 h1.7
  text "no board  / edge pips/ / rat's teeth/ / mouse bites  / in this region / around PCB  / edge connector  / - make sure  / board edge  / is clean" at -55.797,-6 h1.7
Top Component Center:
  lines w0.2: -14.2,0 -13.2,0 ; -13.7,-0.5 -13.7,0.5
Alignment:
  circle w0.1: c12.5,15 r2.5
Mechanical 9:
  lines w0.01: 38.27,-18.4 ccw(c35.945,-18.4) 38.27,-18.355 ; 38.27,-13.595 ccw(c35.945,-13.55) 38.27,-13.55
Board Outline:
  lines w0.2: -20.699,-3.299 cw(c-20.699,-2.499) -21.499,-2.499 -21.499,2.501 cw(c-20.699,2.501) -20.699,3.301 -16.599,3.301 ; -20.7,-3.299 -16.599,-3.299 ; -16.599,-3.299 cw(c-16.599,-4.299) -15.599,-4.299 -15.599,-4.999 cw(c-16.599,-4.999) -16.599,-5.999 -18.999,-5.999 ccw(c-18.999,-6.999) -19.999,-6.999 -19.999,-14.999 ccw(c-17.499,-14.999) -17.499,-17.499 -14.799,-17.499 ccw(c-14.799,-16.499) -14.092,-17.206 ; -16.597,3.301 ccw(c-16.597,4.301) -15.597,4.301 ; -15.599,4.301 -15.599,5.001 ccw(c-16.599,5.001) -16.599,6.001 -18.999,6.001 cw(c-18.999,7.001) -19.999,7.001 -19.999,15.001 cw(c-17.499,15.001) -17.499,17.501 -15.249,17.501 cw(c-15.249,17.251) -14.999,17.251 -14.999,17.001 ccw(c-13.999,17.001) -13.357,16.235 ; -14.099,-17.209 -9.589,-12.699 ; -13.352,16.234 cw(c-13.246,16.007) -13.055,16.168 -9.589,12.699 ; -9.589,-12.693 cw(c-8.831,-13.345) -8.287,-12.505 ; -9.589,12.693 ccw(c-8.831,13.345) -8.287,12.505 ; -8.286,-12.504 ccw(c0,0) 5.119,-14.099 ; -8.286,12.504 cw(c0,0) 5.119,14.099 ; 5.121,-14.105 cw(c5.504,-15.029) 6.218,-14.33 ; 5.121,14.105 ccw(c5.504,15.029) 6.218,14.33 ; 6.221,-14.319 9.101,-17.209 ; 6.221,14.319 9.101,17.209 ; 9.093,-17.206 ccw(c9.801,-16.499) 9.801,-17.499 12.501,-17.499 ccw(c12.501,-14.999) 15.001,-14.999 15.001,-12.299 ccw(c14.001,-12.299) 14.708,-11.592 ; 9.093,17.206 cw(c9.801,16.499) 9.801,17.499 12.501,17.499 cw(c12.501,14.999) 15.001,14.999 15.001,12.299 cw(c14.001,12.299) 14.708,11.592 ; 12.501,8.291 cw(c0.001,0.001) 12.546,-8.221 ; 12.543,-8.219 ccw(c13.344,-8.818) 12.645,-9.532 ; 12.543,8.219 cw(c13.344,8.818) 12.645,9.532 ; 12.641,-9.539 14.711,-11.599 ; 12.641,9.539 14.711,11.599
  text "Board Outline" at 39.225,15.315 h1.7
Top Assy:
  text "Top Assy" at 17.201,13.925 h1.7
Bottom Assy:
  text "Bottom Assy" at 17.2,12.525 h1.7
Drill Drawing:
  text "Drill Drawing" at 39.225,11.01 h1.7
Assembly Notes:
  lines w0.05: -20.004,-12.031 -14.65,-12.031 -14.65,12.031 -20.004,12.031 -20.004,-12.031
Top Dwg:
  circle w0.025: c0,0 r9
  circle w0.025: c12.5,-15 r2.5
  circle w0.025: c12.5,15 r1.515
  circle w0.025: c12.5,15 r2.2
  circle w0.025: c12.5,15 r2.5
  circle w0.025: c-17.5,-15 r2.5
  pour cut-out: 12.5,-16.515 ccw(c12.5,-15) 14.015,-15 ccw(c12.5,-15) 12.5,-13.485 ccw(c12.5,-15) 10.985,-15 ccw(c12.5,-15)
  pour cut-out: 12.5,13.485 ccw(c12.5,15) 14.015,15 ccw(c12.5,15) 12.5,16.515 ccw(c12.5,15) 10.985,15 ccw(c12.5,15)
  pour cut-out: -17.5,13.485 ccw(c-17.5,15) -15.985,15 ccw(c-17.5,15) -17.5,16.515 ccw(c-17.5,15) -19.015,15 ccw(c-17.5,15)
  pour cut-out: -17.5,-16.515 ccw(c-17.5,-15) -15.985,-15 ccw(c-17.5,-15) -17.5,-13.485 ccw(c-17.5,-15) -19.015,-15 ccw(c-17.5,-15)
  lines w0.01: -20,-13.342 -20,-7 cw(c-19,-7) -19,-6 -16.6,-6 ccw(c-16.6,-5) -15.6,-5 -15.6,-4.3 ccw(c-16.6,-4.3) -16.6,-3.3 -20.7,-3.3 cw(c-20.7,-2.5) -21.5,-2.5 -21.5,2.5 cw(c-20.7,2.5) -20.7,3.3 -16.6,3.3 ccw(c-16.6,4.3) -15.6,4.3 -15.6,5 ccw(c-16.6,5) -16.6,6 -19,6 cw(c-19,7) -20,7 -20,12.5
  lines w0.025: -20,-13.342 -20,-15 ccw(c-17.5,-15) -17.5,-17.5 -14.85,-17.5 ; -14.856,-17.5 ccw(c-14.856,-16.5) -14.148,-17.207 -9.614,-12.674 ; -13.083,16.142 -9.614,12.674 ; -13.074,16.15 ccw(c-13.266,15.989) -13.426,16.181 cw(c-14,17) -15,17 ; -9.611,-12.677 cw(c-8.853,-13.329) -8.309,-12.489 ; -9.611,12.677 ccw(c-8.853,13.329) -8.309,12.489 ; -8.309,-12.489 ccw(c0,0) 5.15,-14.088 ; -8.309,12.489 cw(c0,0) 5.15,14.088 ; 5.147,-14.081 cw(c5.53,-15.005) 6.244,-14.305 ; 5.147,14.081 ccw(c5.53,15.005) 6.244,14.305 ; 6.245,-14.304 9.148,-17.207 ccw(c9.856,-16.5) 9.856,-17.5 ; 6.245,14.304 9.148,17.207 cw(c9.856,16.5) 9.856,17.5 ; 9.85,-17.5 12.5,-17.5 ; 9.85,17.5 12.5,17.5 ; 12.494,-8.286 ccw(c13.324,-8.844) 12.624,-9.559 ; 12.494,8.286 cw(c13.324,8.844) 12.624,9.559 ; 12.501,-8.29 ccw(c0,0) 12.501,8.29 ; 12.624,-9.559 14.707,-11.643 cw(c14,-12.35) 15,-12.35 15,-15 ; 12.624,9.559 14.707,11.643 ccw(c14,12.35) 15,12.35 15,15 ; 15,13.342 15,15 ; -15.25,17.5 cw(c-15.25,17.25) -15,17.25 ; -15.25,17.5 cw(c-15.25,17.25) -15,17.25 ; -15.25,17.5 -17.5,17.5 ccw(c-17.5,15) -20,15 -20,12.5 -17.5,12.5 ccw(c-17.5,15) -15,15 -15,17 ; -15,17 -15,17.25 ; -15,17 -15,17.25 ; 12.5,-17.5 ccw(c12.5,-15) 15,-15 ; 12.5,-17.5 ccw(c12.5,-15) 15,-15 ; 12.5,17.5 cw(c12.5,15) 15,15 ; 12.5,17.5 cw(c12.5,15) 15,15
Component Keepout Dwg:
  lines w0.01: -14.5,-7 -17.5,-7 -18.9,-7.3 -20,-7.3 -20,-7 cw(c-19,-7) -19,-6 -16.6,-6 ccw(c-16.6,-5) -15.6,-5 -15.6,-4.3 ccw(c-16.6,-4.3) -16.6,-3.3 -20.7,-3.3 cw(c-20.7,-2.5) -21.5,-2.5 -21.5,2.5 cw(c-20.7,2.5) -20.7,3.3 -16.6,3.3 ccw(c-16.6,4.3) -15.6,4.3 -15.6,5 ccw(c-16.6,5) -16.6,6 -19,6 cw(c-19,7) -20,7 -20,7.3 -18.9,7.3 -17.5,7 -14.5,7
  lines w0.025: -20,12.55 -20,15 cw(c-17.5,15) -17.5,17.5 -15.25,17.5 cw(c-15.25,17.25) -15,17.25 -15,17 ccw(c-14,17) -14.156,16.012 ; -19.999,12.55 ccw(c-17.5,15) -14.15,16.015 ; -14.5,-7 -14.5,7 ; 15,-12.551 15,-15 cw(c12.5,-15) 12.5,-17.5 -15.229,-17.5 -17.5,-17.5 cw(c-17.5,-15) -20,-15 -20,-12.551 cw(c-17.5,-15) -14.146,-16 9.146,-16 cw(c12.5,-15) 15,-12.551 ; 15,12.551 15,15 ccw(c12.5,15) 12.5,17.5 -12.75,17.5 ccw(c-12.75,17.25) -13,17.25 -13,17 cw(c-14,17) -14,16 9.146,16 ccw(c12.5,15) 15,12.551
Routing Keepout Dwg:
  lines w0.01: -21.1,-2.468 ccw(c-20.7,-2.468) -20.7,-2.868 -16.8,-2.868 -16.8,2.874 -20.698,2.874 ; -21.1,-2.466 -21.1,2.477 ; -21.1,2.474 cw(c-20.7,2.474) -20.7,2.874
  lines w0.025: -20,-13.342 -20,-15 ccw(c-17.5,-15) -17.5,-17.5 -15.842,-17.5 ; -15.842,17.5 cw(c-17.5,15) -14.672,16 ; 10.841,-17.5 12.5,-17.5 ; 10.842,17.5 12.5,17.5 cw(c12.5,15) 15,15 15,13.342 ; 12.5,-17.5 ccw(c12.5,-15) 15,-15 ; -20,13.342 ccw(c-17.5,15) -15.842,17.5 -17.5,17.5 ccw(c-17.5,15) -20,15 -20,13.342
Silhouette:
  circle w0.25: c-16.2,1.27 r0.12
  circle w0.25: c-16.2,0 r0.12
  circle w0.25: c-16.2,-1.27 r0.12
  pour cut-out: 12.5,13.485 ccw(c12.5,15) 14.015,15 ccw(c12.5,15) 12.5,16.515 ccw(c12.5,15) 10.985,15 ccw(c12.5,15)
  pour cut-out: 12.5,-16.515 ccw(c12.5,-15) 14.015,-15 ccw(c12.5,-15) 12.5,-13.485 ccw(c12.5,-15) 10.985,-15 ccw(c12.5,-15)
  pour cut-out: -17.5,-16.515 ccw(c-17.5,-15) -15.985,-15 ccw(c-17.5,-15) -17.5,-13.485 ccw(c-17.5,-15) -19.015,-15 ccw(c-17.5,-15)
  pour cut-out: -17.5,13.485 ccw(c-17.5,15) -15.985,15 ccw(c-17.5,15) -17.5,16.515 ccw(c-17.5,15) -19.015,15 ccw(c-17.5,15)
  pour cut-out: -18.5,2.85 ccw(c-18.5,2.5) -18.5,2.15 -17.8,2.15 ccw(c-17.8,2.5) -17.8,2.85
  pour cut-out: -18.5,-2.85 cw(c-18.5,-2.5) -18.5,-2.15 -17.8,-2.15 cw(c-17.8,-2.5) -17.8,-2.85
  pour cut-out: -16.516,-0.82 cw(c-16.2,-1.27) -16.516,-1.72 -20.519,-1.72 cw(c-20.519,-1.439) -20.8,-1.439 -20.8,-1.101 cw(c-20.519,-1.101) -20.519,-0.82
  pour cut-out: -16.516,0.45 cw(c-16.2,0) -16.516,-0.45 -20.519,-0.45 cw(c-20.519,-0.169) -20.8,-0.169 -20.8,0.169 cw(c-20.519,0.169) -20.519,0.45
  pour cut-out: -16.516,1.72 cw(c-16.2,1.27) -16.516,0.82 -20.019,0.82 cw(c-20.019,1.101) -20.3,1.101 -20.3,1.439 cw(c-20.019,1.439) -20.019,1.72
Construction:
  circle w0.025: c12.5,-15 r1.515
  circle w0.025: c-17.5,-15 r1.515
  circle w0.025: c-17.5,15 r1.515
  circle w0.025: c12.5,15 r1.515
  lines w0.01: -18.5,-2.85 cw(c-18.5,-2.5) -18.5,-2.15 -17.8,-2.15 cw(c-17.8,-2.5) -17.8,-2.85 ; -18.5,2.85 ccw(c-18.5,2.5) -18.5,2.15 -17.8,2.15 ccw(c-17.8,2.5) -17.8,2.85 ; -16.6,-3.3 -20.7,-3.3 cw(c-20.7,-2.5) -21.5,-2.5 -21.5,2.5 cw(c-20.7,2.5) -20.7,3.3 -16.6,3.3 ; -16.6,-3.3 cw(c-16.6,-4.3) -15.6,-4.3 -15.6,-5 cw(c-16.6,-5) -16.6,-6 -19,-6 ccw(c-19,-7) -20,-7 -20,-15 ccw(c-17.5,-15) -17.5,-17.5 -14.8,-17.5 ccw(c-14.8,-16.5) -14.093,-17.207 ; -16.598,3.3 ccw(c-16.598,4.3) -15.598,4.3 ; -15.6,4.3 -15.6,5 ccw(c-16.6,5) -16.6,6 -19,6 cw(c-19,7) -20,7 -20,15 cw(c-17.5,15) -17.5,17.5 -15.25,17.5 cw(c-15.25,17.25) -15,17.25 -15,17 ccw(c-14,17) -13.357,16.234 ; -14.1,-17.21 -9.59,-12.7 ; -13.352,16.233 cw(c-13.247,16.007) -13.055,16.167 -9.59,12.698 ; -9.59,-12.693 cw(c-8.831,-13.346) -8.288,-12.506 ; -9.59,12.692 ccw(c-8.831,13.344) -8.288,12.505 ; -8.286,-12.505 ccw(c-0.001,-0.001) 5.119,-14.1 ; -8.286,12.503 cw(c-0.001,-0.001) 5.119,14.099 ; 5.121,-14.106 cw(c5.503,-15.03) 6.218,-14.331 ; 5.121,14.105 ccw(c5.503,15.029) 6.218,14.329 ; 6.22,-14.32 9.1,-17.21 ; 6.22,14.318 9.1,17.208 ; 9.093,-17.207 ccw(c9.8,-16.5) 9.8,-17.5 12.5,-17.5 ccw(c12.5,-15) 15,-15 15,-12.3 ccw(c14,-12.3) 14.707,-11.593 ; 9.093,17.206 cw(c9.8,16.498) 9.8,17.498 12.5,17.498 cw(c12.5,14.998) 15,14.998 15,12.298 cw(c14,12.298) 14.707,11.591 ; 12.501,8.29 cw(c0,0) 12.546,-8.222 ; 12.542,-8.22 ccw(c13.344,-8.818) 12.644,-9.533 ; 12.542,8.218 cw(c13.344,8.817) 12.644,9.532 ; 12.64,-9.54 14.71,-11.6 ; 12.64,9.538 14.71,11.598 ; -20.8,-1.439 ccw(c-20.519,-1.439) -20.519,-1.72 -16.516,-1.72 ccw(c-16.2,-1.27) -16.516,-0.82 -20.519,-0.82 ccw(c-20.519,-1.101) -20.8,-1.101 -20.8,-1.439 ; -20.8,-0.169 ccw(c-20.519,-0.169) -20.519,-0.45 -16.516,-0.45 ccw(c-16.2,0) -16.516,0.45 -20.519,0.45 ccw(c-20.519,0.169) -20.8,0.169 -20.8,-0.169 ; -20.3,1.101 ccw(c-20.019,1.101) -20.019,0.82 -16.516,0.82 ccw(c-16.2,1.27) -16.516,1.72 -20.019,1.72 ccw(c-20.019,1.439) -20.3,1.439 -20.3,1.101

## Text inside footprints (layer, text, board x,y; h text height)
EC1: Mechanical 9 "Jacdac / cable connector  / body" at -25.658,-4.821 h1.7 r90